# Altium PCB PCB_ME461_2023-10-08.pcbdoc
Units mil, origin at the board's own origin, x right, y up, seen from the top; angles counter-clockwise.
Board outline 2150 x 3242.37 mil, 2 copper layers (Top Layer, Bottom Layer); 4 components, 22 nets, 44 pads, 0 vias.
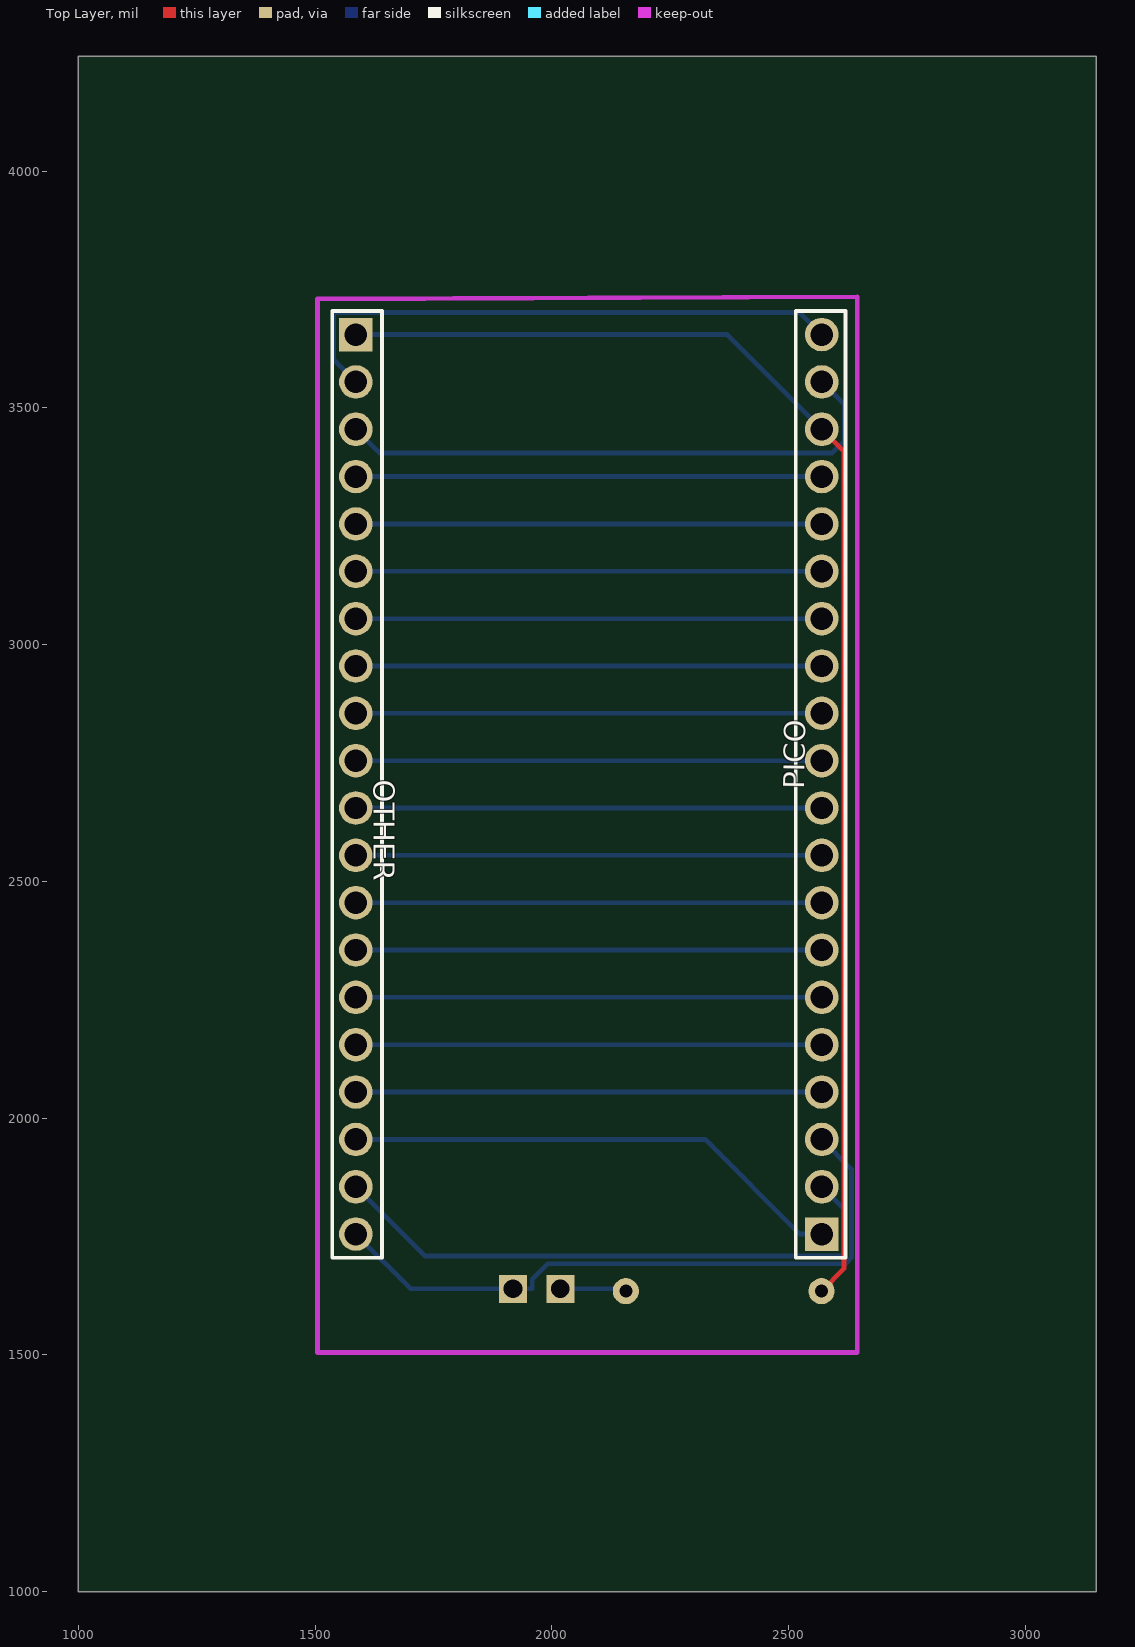
[diagram p0: Top Layer view]
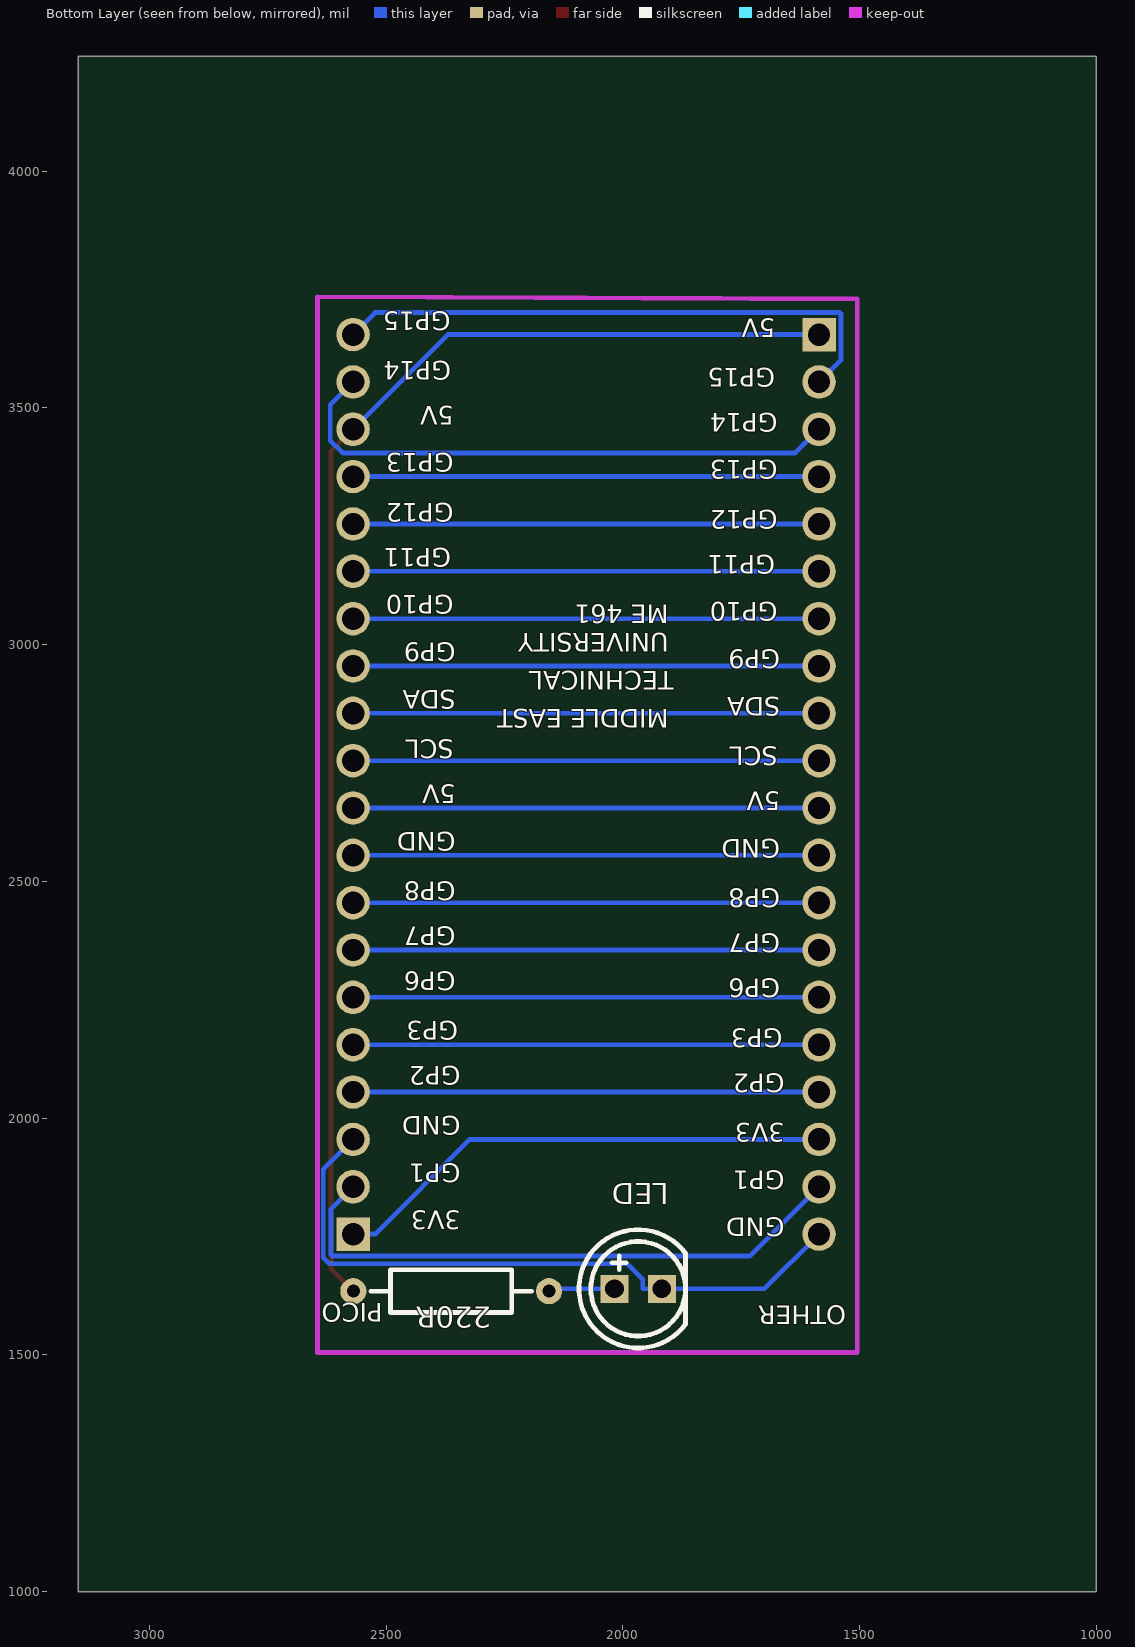
[diagram p1: Bottom Layer view, seen from below]

## Layer stack, top to bottom
Top Layer: signal copper (thickness not stored)
Dielectric: dielectric 12.6, FR-4, Dk 4.8
Bottom Layer: signal copper (thickness not stored)

## Board outline
3150,1000 1000,1000 1000,4242.37 3150,4242.37

## Components (designator, comment, footprint, x,y, rotation, side; value= is the part's Value field where it differs from the comment)
220R "220Ω" RES-TH_BD2.3-L6.5-P10.50-D0.5 2362.8,1634.37 r0 bottom
LED "LED-TH-3MM_R" LED-TH_BD5.4-P2.54-FD_RED 1967.8,1639.37 r0 bottom
OTHER "Header-Male-2.54_1x20" HDR-TH_20P-P2.54-V-M-1 1585.8,2704.97 r270 top
PICO "Header-Male-2.54_1x20" HDR-TH_20P-P2.54-V-M-1 2569.99,2704.97 r90 top

## Footprints (in the part's own frame and the unit in brackets; to place one, negate y for a bottom-side part, rotate by r counter-clockwise, add the part's x,y. Pads: shape width x height; smd on the part's side, far side on the other; paste and mask are expansions set on the pad)
HDR-TH_20P-P2.54-V-M-1 [mm]
  rect 1.8x1.8 hole 1.2 paste+0 mask+0.051: 1(-24.13,0)
  round 1.8 hole 1.2 paste+0 mask+0.051: 2(-21.59,0) 3(-19.05,0) 4(-16.51,0) 5(-13.97,0) 6(-11.43,0) 7(-8.89,0) 8(-6.35,0) 9(-3.81,0) 10(-1.27,0) 11(1.27,0) 12(3.81,0) 13(6.35,0) 14(8.89,0) 15(11.43,0) 16(13.97,0) 17(16.51,0) 18(19.05,0) 19(21.59,0) 20(24.13,0)
  silkscreen extent -25.4,-1.27 25.4,1.4
LED-TH_BD5.4-P2.54-FD_RED [mm]
  rect 1.5x1.5 hole 1 paste+0 mask+0.051: 1(1.27,0) 2(-1.27,0)
  silkscreen extent -2.54,-3.17 3.17,3.17
RES-TH_BD2.3-L6.5-P10.50-D0.5 [mm]
  round 1.4 hole 0.7 paste+0 mask+0.051: 1(5.25,0) 2(-5.25,0)
  silkscreen extent -4.32,-1.15 4.32,1.15

## Nets (pads, with @x,y where several pads share a name; then routed paths per layer and width w, separated by ;. In a path a pad name is that pad's centre, name@x,y a point inside that pad or via, vN(x,y) a via of type N, cw(c..) or ccw(c..) an arc to the next point about the centre after c; other vN are vias at no path point)
3V3: OTHER.18 PICO.1 | length 1067.1
  Bottom Layer w10: OTHER.18 2323.58,1954.97 2523.58,1754.97 PICO.1
GND: LED.2 OTHER.20 PICO.3 | length 1409.9
  Bottom Layer w10: OTHER.20 1701.39,1639.37 LED.2 1958.31,1639.37 1958.31,1659.63 1991.1,1692.42 2620.26,1692.42 2632.75,1704.91 2632.75,1892.22 PICO.3
GP1: OTHER.19 PICO.2 | length 1255.4
  Bottom Layer w10: OTHER.19 1732.28,1708.48 2613.58,1708.48 2616.49,1711.39 2616.49,1808.48 PICO.2
GP14: OTHER.3 PICO.19 | length 1207.6
  Bottom Layer w10: OTHER.3 1635.79,3404.97 2591.92,3404.97 2618.14,3431.19 2618.14,3506.83 PICO.19
GP15: OTHER.2 PICO.20 | length 1214
  Bottom Layer w10: OTHER.2 1539.3,3601.46 1539.3,3698.55 1542.21,3701.46 2523.51,3701.46 PICO.20
OTHER_4: OTHER.4 PICO.17 | length 984.2
  Bottom Layer w10: OTHER.4 PICO.17
OTHER_5: OTHER.5 PICO.16 | length 984.2
  Bottom Layer w10: OTHER.5 PICO.16
OTHER_6: OTHER.6 PICO.15 | length 984.2
  Bottom Layer w10: OTHER.6 PICO.15
OTHER_7: OTHER.7 PICO.14 | length 984.2
  Bottom Layer w10: OTHER.7 PICO.14
OTHER_8: OTHER.8 PICO.13 | length 984.2
  Bottom Layer w10: OTHER.8 PICO.13
OTHER_9: OTHER.9 PICO.12 | length 984.2
  Bottom Layer w10: OTHER.9 PICO.12
OTHER_10: OTHER.10 PICO.11 | length 984.2
  Bottom Layer w10: OTHER.10 PICO.11
OTHER_11: OTHER.11 PICO.10 | length 984.2
  Bottom Layer w10: OTHER.11 PICO.10
OTHER_12: OTHER.12 PICO.9 | length 984.2
  Bottom Layer w10: OTHER.12 PICO.9
OTHER_13: OTHER.13 PICO.8 | length 984.2
  Bottom Layer w10: OTHER.13 PICO.8
OTHER_14: OTHER.14 PICO.7 | length 984.2
  Bottom Layer w10: OTHER.14 PICO.7
OTHER_15: OTHER.15 PICO.6 | length 984.2
  Bottom Layer w10: OTHER.15 PICO.6
OTHER_16: OTHER.16 PICO.5 | length 984.2
  Bottom Layer w10: OTHER.16 PICO.5
OTHER_17: OTHER.17 PICO.4 | length 984.2
  Bottom Layer w10: OTHER.17 PICO.4
R1_2: 220R.2 LED.1 | length 140.4
  Bottom Layer w10: LED.1 2151.11,1639.37 220R.2
S$5780: 
VCC: 220R.1 OTHER.1 PICO.18 | length 2926.7
  Top Layer w10: 220R.1 2616.82,1681.7 2616.82,3408.15 PICO.18
  Bottom Layer w10: OTHER.1 2370,3654.97 PICO.18

## Silkscreen, mask and mechanical layers (free items; w line width, h text height)
Bottom Overlay:
  text "GP15" at 2363.76,3703 h39.37 r180
  text "5V" at 1678.76,3688 h39.37 r180
  text "GP14" at 2362.8,3599.06 h39.37 r180
  text "GP15" at 1677.81,3584.06 h39.37 r180
  text "5V" at 2357.8,3504.06 h39.37 r180
  text "GP14" at 1672.81,3489.06 h39.37 r180
  text "GP13" at 2357.8,3404.06 h39.37 r180
  text "GP13" at 1672.81,3389.06 h39.37 r180
  text "GP12" at 2357.8,3299.06 h39.37 r180
  text "GP12" at 1672.81,3284.06 h39.37 r180
  text "GP11" at 2362.8,3204.06 h39.37 r180
  text "GP11" at 1677.81,3189.06 h39.37 r180
  text "GP10" at 2357.8,3104.06 h39.37 r180
  text "GP10" at 1672.81,3089.06 h39.37 r180
  text "ME 461" at 1902.8,3084.06 h39.37 r180
  text "UNIVERSITY" at 1902.8,3024.06 h39.37 r180
  text "GP9" at 2352.8,3004.06 h39.37 r180
  text "GP9" at 1667.81,2989.06 h39.37 r180
  text "TECHNICAL" at 1892.8,2944.06 h39.37 r180
  text "SDA" at 2352.8,2904.06 h39.37 r180
  text "SDA" at 1667.81,2889.06 h39.37 r180
  text "MIDDLE EAST" at 1902.8,2864.06 h39.37 r180
  text "SCL" at 2357.8,2799.06 h39.37 r180
  text "SCL" at 1672.81,2784.06 h39.37 r180
  text "5V" at 2352.8,2704.06 h39.37 r180
  text "5V" at 1667.81,2689.06 h39.37 r180
  text "GND" at 2352.8,2604.06 h39.37 r180
  text "GND" at 1667.81,2589.06 h39.37 r180
  text "GP8" at 2352.8,2499.06 h39.37 r180
  text "GP8" at 1667.81,2484.06 h39.37 r180
  text "GP7" at 2352.8,2404.06 h39.37 r180
  text "GP7" at 1667.81,2389.06 h39.37 r180
  text "GP6" at 2352.8,2309.06 h39.37 r180
  text "GP6" at 1667.81,2294.06 h39.37 r180
  text "GP3" at 2347.8,2204.06 h39.37 r180
  text "GP3" at 1662.81,2189.06 h39.37 r180
  text "GP2" at 2342.8,2109.06 h39.37 r180
  text "GP2" at 1657.81,2094.06 h39.37 r180
  text "GND" at 2342.8,2004.06 h39.37 r180
  text "3V3" at 1657.81,1989.06 h39.37 r180
  text "GP1" at 2342.8,1904.06 h39.37 r180
  text "GP1" at 1657.81,1889.06 h39.37 r180
  text "3V3" at 2342.8,1804.06 h39.37 r180
  text "GND" at 1657.81,1789.06 h39.37 r180
  text "PICO" at 2507.8,1609.06 h39.37 r180
  text "OTHER" at 1527.8,1604.06 h39.37 r180